# Altium PCB 混频器.PcbDoc
Units mil, origin at the board's own origin, x right, y up, seen from the top; angles counter-clockwise.
Board outline 3896 x 3698 mil, 2 copper layers (Top Layer, Bottom Layer); 45 components, 5 nets, 153 pads, 522 vias.
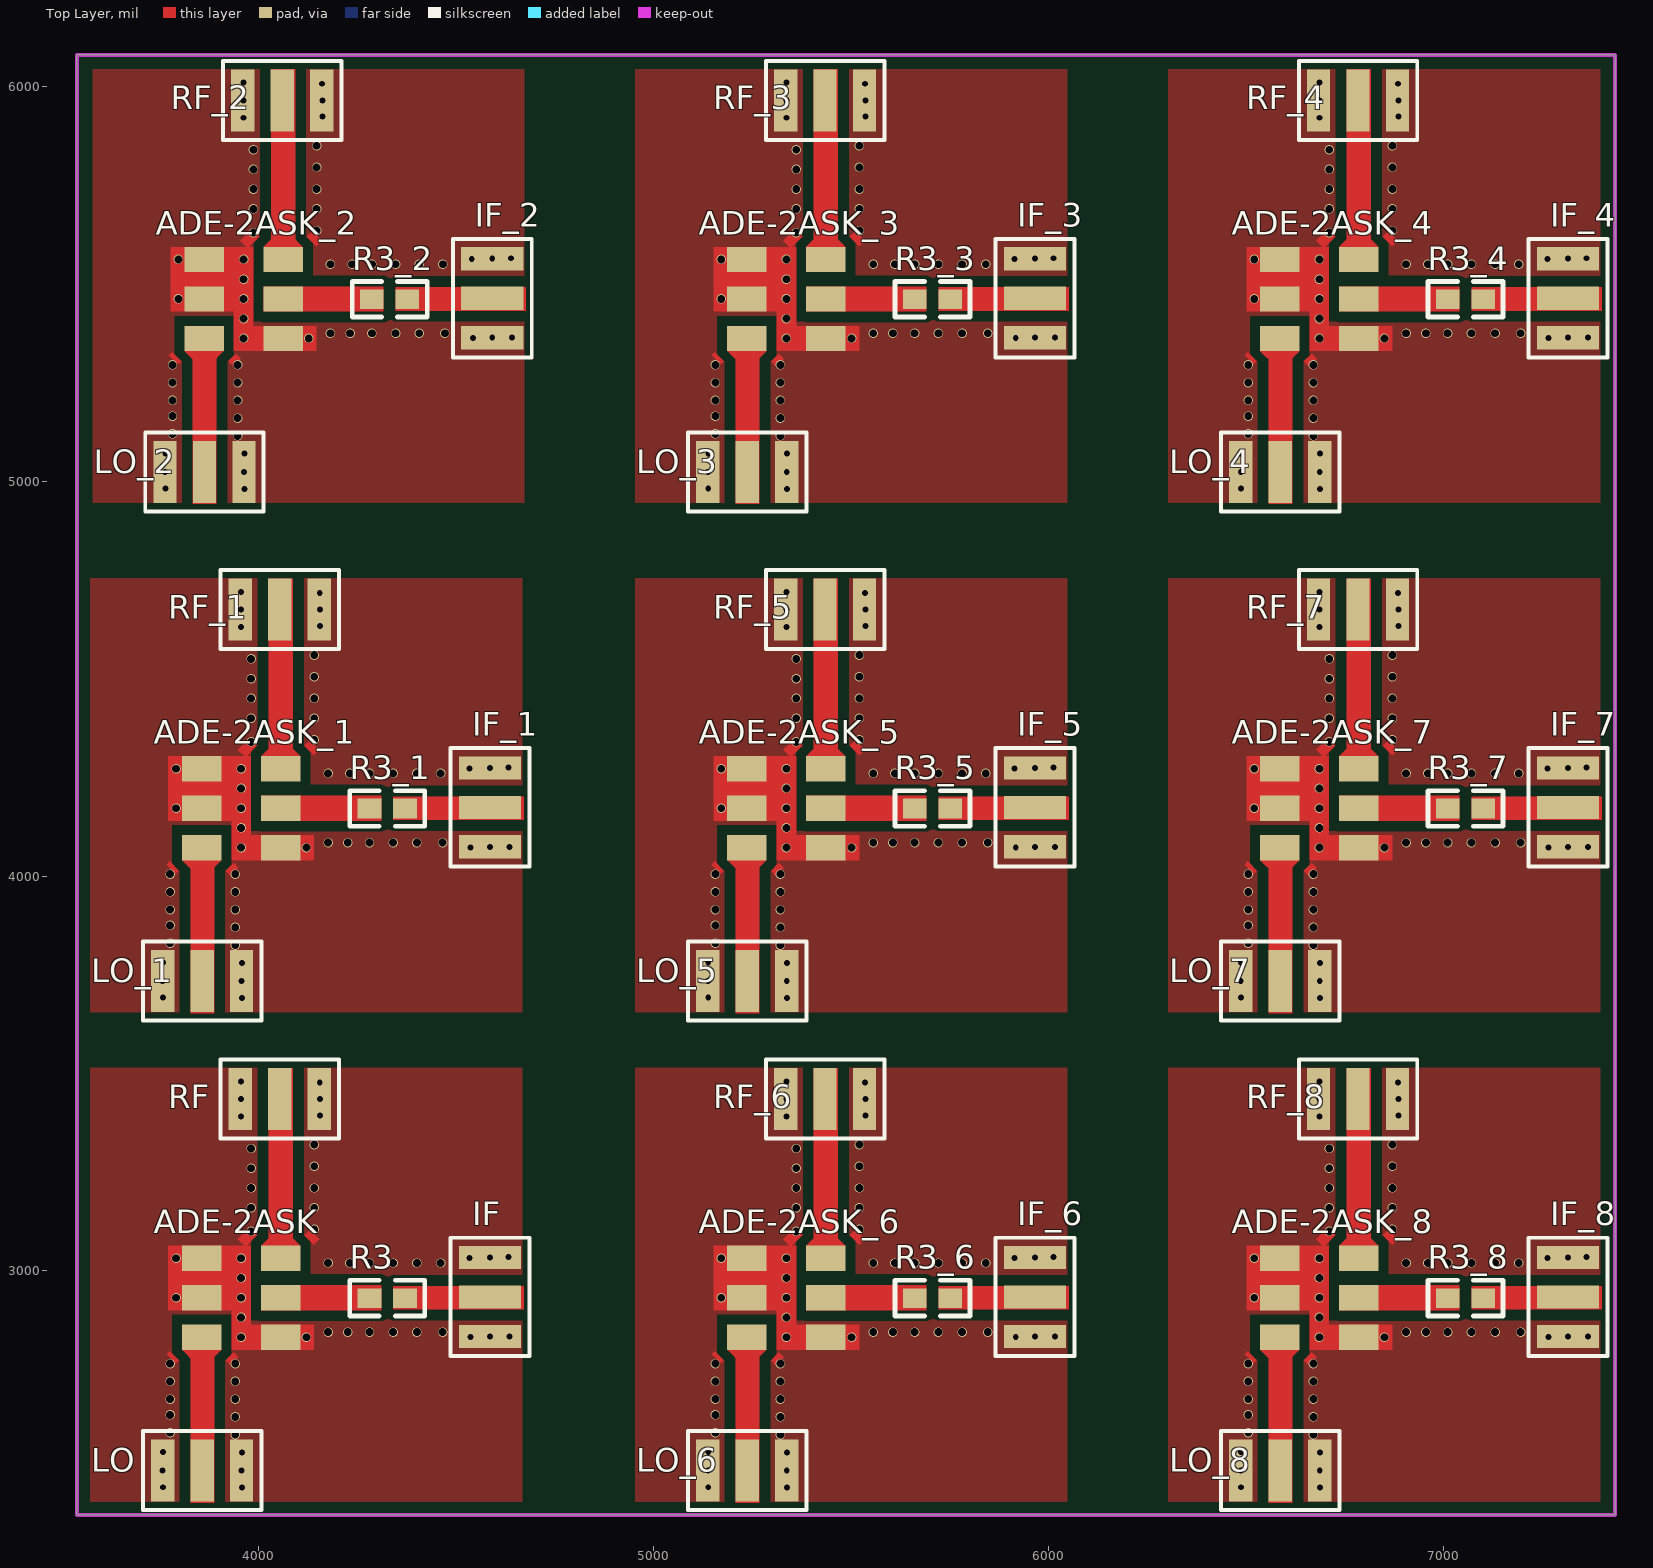
[diagram p0: Top Layer view]
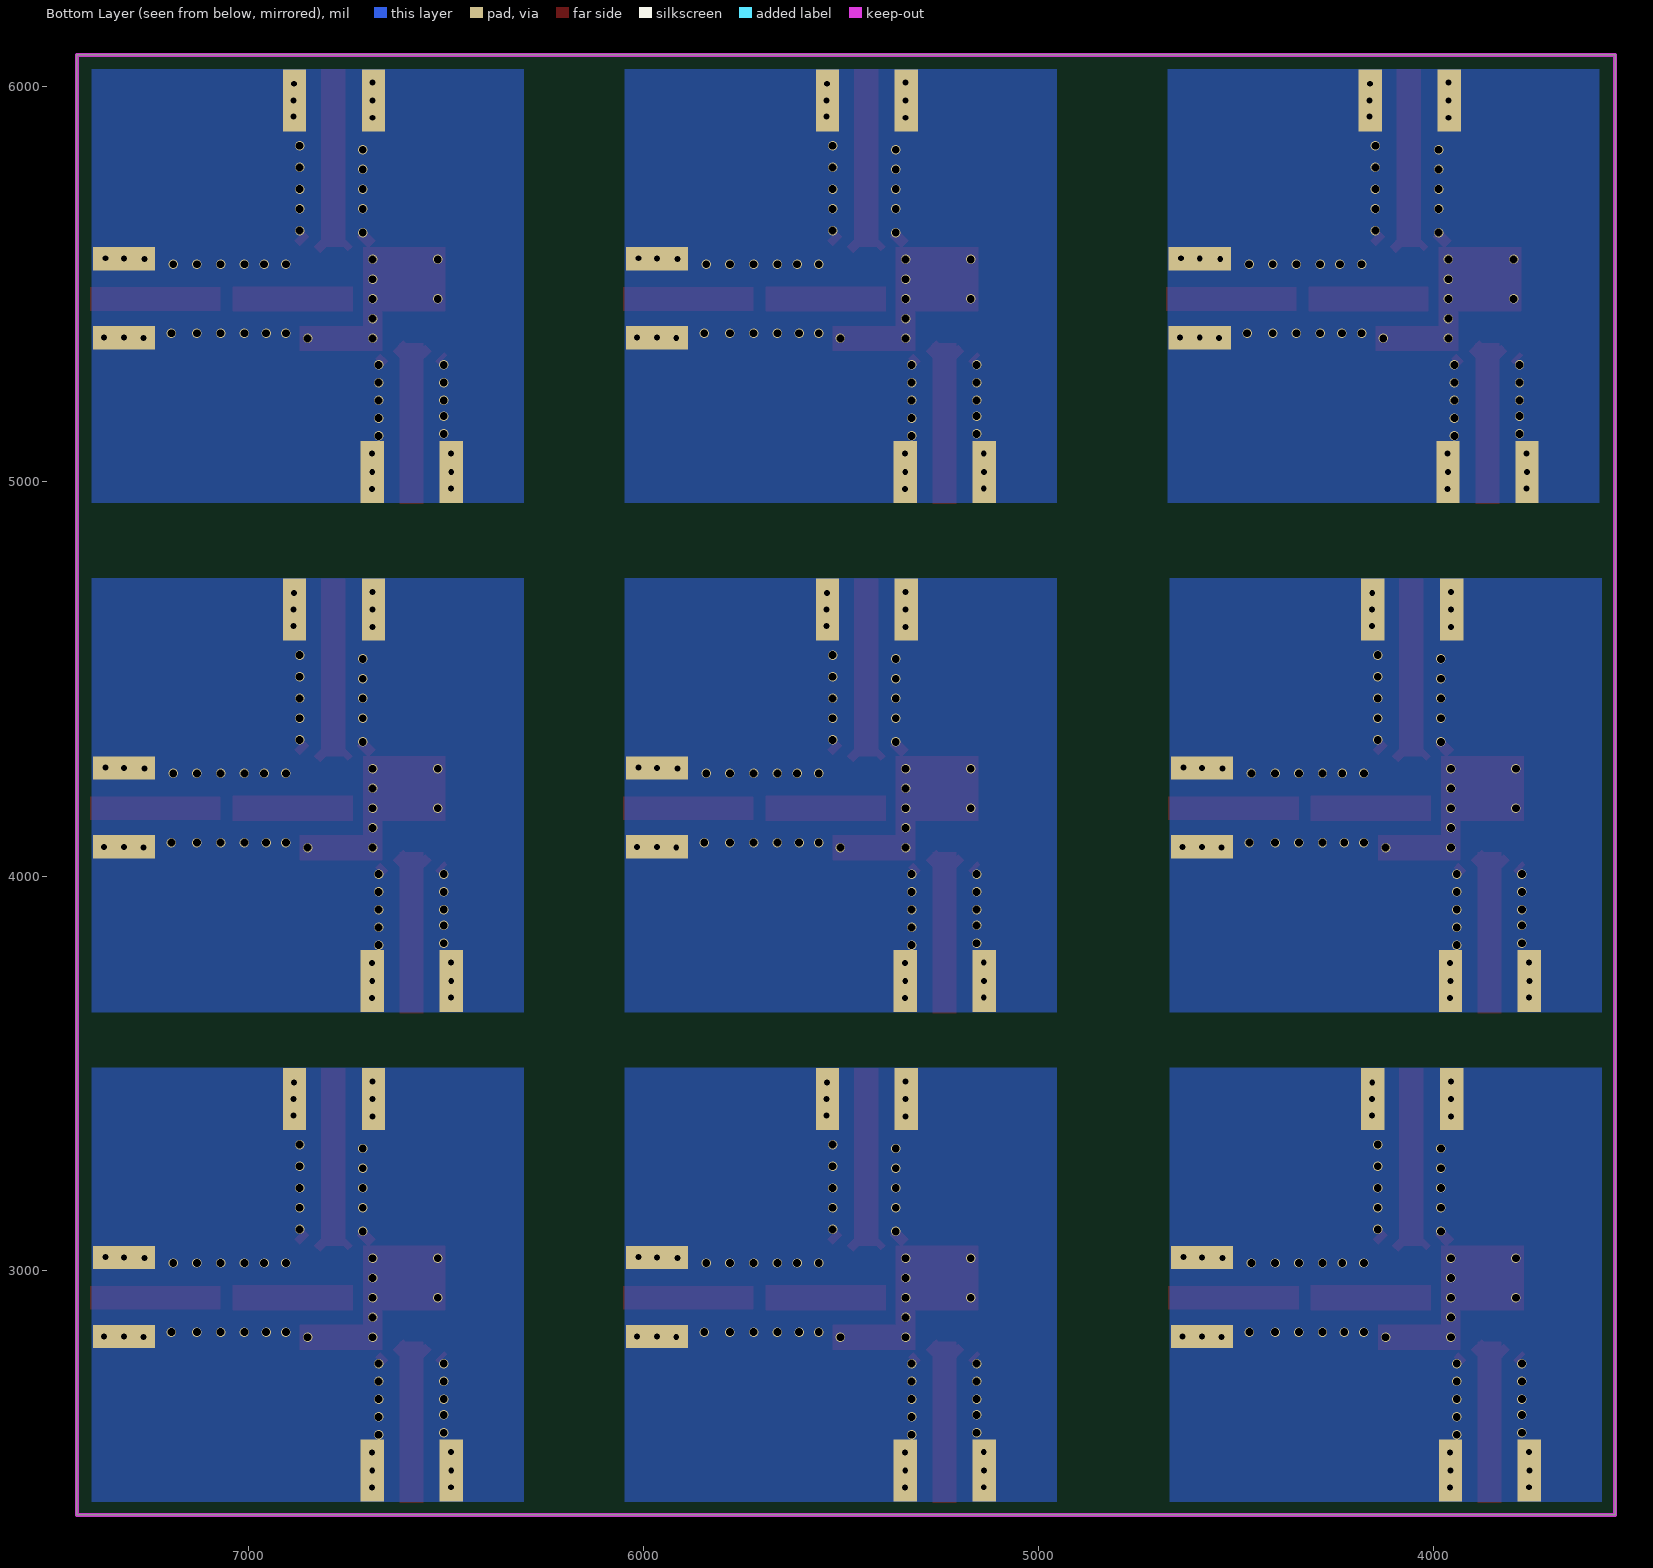
[diagram p1: Bottom Layer view, seen from below]
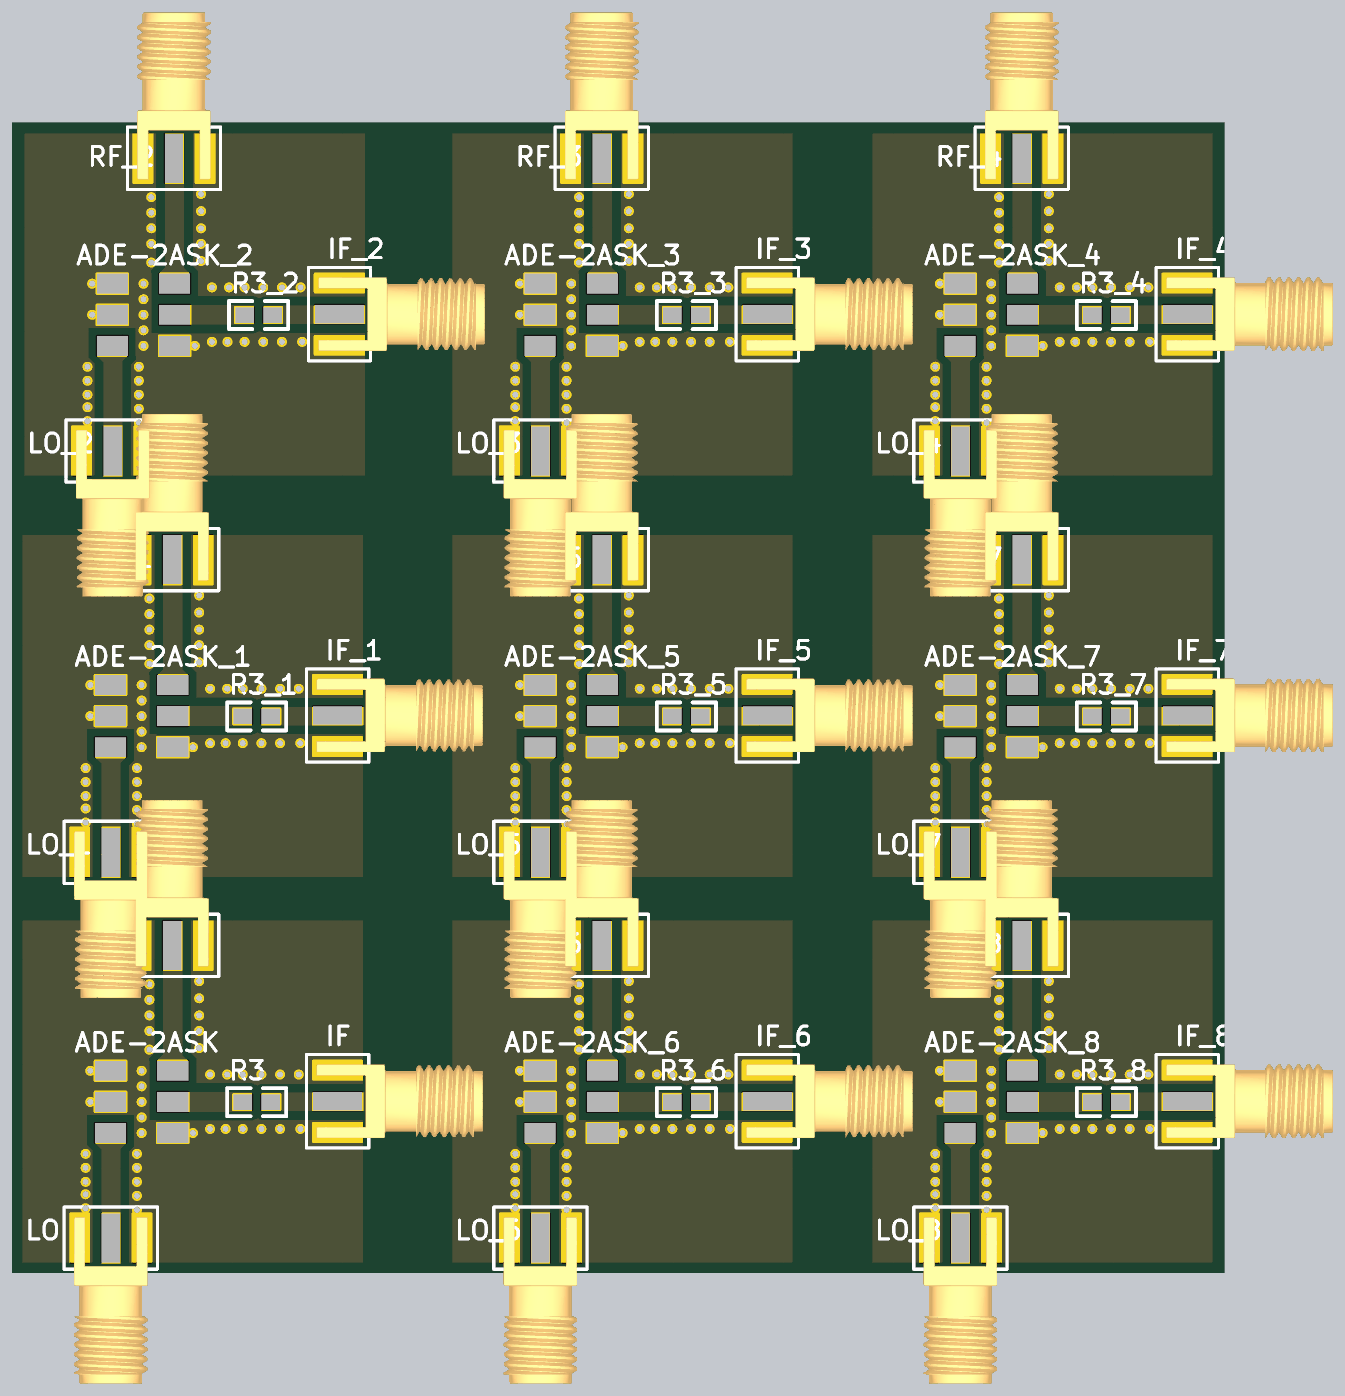
[diagram p2: 3D render of the assembled board from above, using the file's embedded part models]

## Layer stack, top to bottom
Top Solder: solder mask 0.4, Solder Resist, Dk 3.5
Top Layer: signal copper 1.4
Dielectric 1: dielectric 12.6, FR-4, Dk 4.8
Bottom Layer: signal copper 1.4
Bottom Solder: solder mask 0.4, Solder Resist, Dk 3.5

## Board outline
3539,2382 3539,6080 7435,6080 7435,2382

## Design rules (kind name [scope] priority, off if disabled: settings)
Clearance [All] p1: gap=10
PolygonConnect [All] p1: connectstyle=Direct reliefconductorwidth=10 reliefentries=4 polygonreliefangle="90 Angle" airgapwidth=10
RoutingVias [All] p1: holewidth=28 width=50 viastyle="Through Hole" minholewidth=28 minwidth=50 maxholewidth=28 maxwidth=50
SolderMaskExpansion [All] p1: expansion=4
Width [All] p1: maxlimit=60 minlimit=6 preferedwidth=10
30 further rules are at their usual default settings.

## Classes and differential pairs
component class 混频器: ADE-2ASK IF LO R3 RF

## Components (designator, comment, footprint, x,y, rotation, side; value= is the part's Value field where it differs from the comment)
ADE-2ASK "4 HEADER" PL-052 4105,2800 r90 top
ADE-2ASK_1 "4 HEADER" PL-052 4105,4040 r90 top (schematic designator ADE-2ASK)
ADE-2ASK_2 "4 HEADER" PL-052 4111,5330 r90 top (schematic designator ADE-2ASK)
ADE-2ASK_3 "4 HEADER" PL-052 5486,5330 r90 top (schematic designator ADE-2ASK)
ADE-2ASK_4 "4 HEADER" PL-052 6836,5330 r90 top (schematic designator ADE-2ASK)
ADE-2ASK_5 "4 HEADER" PL-052 5486,4040 r90 top (schematic designator ADE-2ASK)
ADE-2ASK_6 "4 HEADER" PL-052 5486,2800 r90 top (schematic designator ADE-2ASK)
ADE-2ASK_7 "4 HEADER" PL-052 6836,4040 r90 top (schematic designator ADE-2ASK)
ADE-2ASK_8 "4 HEADER" PL-052 6836,2800 r90 top (schematic designator ADE-2ASK)
IF "SMA-2" SMA-2 4585,2934 r90 top
IF_1 "SMA-2" SMA-2 4585,4174 r90 top (schematic designator IF)
IF_2 "SMA-2" SMA-2 4591,5464 r90 top (schematic designator IF)
IF_3 "SMA-2" SMA-2 5966,5464 r90 top (schematic designator IF)
IF_4 "SMA-2" SMA-2 7316,5464 r90 top (schematic designator IF)
IF_5 "SMA-2" SMA-2 5966,4174 r90 top (schematic designator IF)
IF_6 "SMA-2" SMA-2 5966,2934 r90 top (schematic designator IF)
IF_7 "SMA-2" SMA-2 7316,4174 r90 top (schematic designator IF)
IF_8 "SMA-2" SMA-2 7316,2934 r90 top (schematic designator IF)
LO "SMA-2" SMA-2 3856,2494 r0 top
LO_1 "SMA-2" SMA-2 3856,3734 r0 top (schematic designator LO)
LO_2 "SMA-2" SMA-2 3862,5024 r0 top (schematic designator LO)
LO_3 "SMA-2" SMA-2 5237,5024 r0 top (schematic designator LO)
LO_4 "SMA-2" SMA-2 6587,5024 r0 top (schematic designator LO)
LO_5 "SMA-2" SMA-2 5237,3734 r0 top (schematic designator LO)
LO_6 "SMA-2" SMA-2 5237,2494 r0 top (schematic designator LO)
LO_7 "SMA-2" SMA-2 6587,3734 r0 top (schematic designator LO)
LO_8 "SMA-2" SMA-2 6587,2494 r0 top (schematic designator LO)
R3 "RES" 0805 4370,2931 r180 top
R3_1 "RES" 0805 4370,4171 r180 top (schematic designator R3)
R3_2 "RES" 0805 4376,5461 r180 top (schematic designator R3)
R3_3 "RES" 0805 5751,5461 r180 top (schematic designator R3)
R3_4 "RES" 0805 7101,5461 r180 top (schematic designator R3)
R3_5 "RES" 0805 5751,4171 r180 top (schematic designator R3)
R3_6 "RES" 0805 5751,2931 r180 top (schematic designator R3)
R3_7 "RES" 0805 7101,4171 r180 top (schematic designator R3)
R3_8 "RES" 0805 7101,2931 r180 top (schematic designator R3)
RF "SMA-2" SMA-2 4053,3435 r180 top
RF_1 "SMA-2" SMA-2 4053,4675 r180 top (schematic designator RF)
RF_2 "SMA-2" SMA-2 4059,5965 r180 top (schematic designator RF)
RF_3 "SMA-2" SMA-2 5434,5965 r180 top (schematic designator RF)
RF_4 "SMA-2" SMA-2 6784,5965 r180 top (schematic designator RF)
RF_5 "SMA-2" SMA-2 5434,4675 r180 top (schematic designator RF)
RF_6 "SMA-2" SMA-2 5434,3435 r180 top (schematic designator RF)
RF_7 "SMA-2" SMA-2 6784,4675 r180 top (schematic designator RF)
RF_8 "SMA-2" SMA-2 6784,3435 r180 top (schematic designator RF)

## Footprints (in the part's own frame and the unit in brackets; to place one, negate y for a bottom-side part, rotate by r counter-clockwise, add the part's x,y. Pads: shape width x height; smd on the part's side, far side on the other; paste and mask are expansions set on the pad)
0805 [mil]
  rect 60x50 smd: 1(0,0) 2(90,0)
  silkscreen extent -50,-45 140,45
PL-052 [mil]
  rect 64x100 smd: 1(32,50) 1(132,250) 1(232,250) 2(132,50) 3(232,50) 4(32,250)
  Top Layer region: 0,-35 64,-35 64,175 0,175
  Top Layer region: 0,125 264,125 264,175 0,175
  Top Layer region: 100,170 264,170 264,335 100,335
SMA-2 [mm]
  rect 1.5x4 smd: 1(0,0)
  rect 1.5x4 all layers, no hole: 2(2.54,0) 3(-2.54,0)
  silkscreen extent -3.81,-2.54 3.81,2.54, body extent -3,-11.89 3,1.71, height 3.2

## Part data
ADE-2ASK ADE-2ASK_1 ADE-2ASK_2 ADE-2ASK_3 ADE-2ASK_4 ADE-2ASK_5 ADE-2ASK_6 ADE-2ASK_7 ADE-2ASK_8: "4 Pin Header"

## Via types
v1: diameter 24, hole 20, Top Layer to Bottom Layer, 360 vias
v2: diameter 30, hole 15, Top Layer to Bottom Layer, 162 vias

## Nets (pads, with @x,y where several pads share a name; then routed paths per layer and width w, separated by ;. In a path a pad name is that pad's centre, name@x,y a point inside that pad or via, vN(x,y) a via of type N, cw(c..) or ccw(c..) an arc to the next point about the centre after c; other vN are vias at no path point)
GND: ADE-2ASK.1 IF.2 IF.3 LO.2 LO.3 RF.2 RF.3
  other v1: 3940,2585 3775,2590 3940,2630 3775,2635 3775,2675 3940,2675 3775,2720 3940,2720 3775,2765 3940,2765 3955,2832 4120,2832 4175,2845 4225,2845 4280,2845 4340,2845 4400,2845 4465,2845 3955,2882 3790,2932 3955,2932 3955,2982 4175,3020 4230,3020 4280,3020 4340,3020 4400,3020 4460,3020 3790,3032 3955,3032 3980,3100 4140,3105 3980,3160 4140,3160 3980,3210 4140,3210 3980,3260 4140,3265 3980,3310 4140,3320
  other v2: 3957,2451 3757,2452 3756,2494 3956,2494 3957,2540 3757,2541 4536,2833 4585,2834 4635,2834 4533,3033 4585,3034 4632,3035 3955,3391 4155,3394 3955,3435 4155,3435 4154,3477 3955,3480
NetADE-2ASK_2: ADE-2ASK.2 R3.2
NetADE-2ASK_3: ADE-2ASK.3 RF.1
NetADE-2ASK_4: ADE-2ASK.4 LO.1
NetIF_1: IF.1 R3.1
pads on no net: ADE-2ASK_1.1 ADE-2ASK_1.2 ADE-2ASK_1.3 ADE-2ASK_1.4 ADE-2ASK_2.1 ADE-2ASK_2.2 ADE-2ASK_2.3 ADE-2ASK_2.4 ADE-2ASK_3.1 ADE-2ASK_3.2 ADE-2ASK_3.3 ADE-2ASK_3.4 ADE-2ASK_4.1 ADE-2ASK_4.2 ADE-2ASK_4.3 ADE-2ASK_4.4 ADE-2ASK_5.1 ADE-2ASK_5.2 ADE-2ASK_5.3 ADE-2ASK_5.4 ADE-2ASK_6.1 ADE-2ASK_6.2 ADE-2ASK_6.3 ADE-2ASK_6.4 ADE-2ASK_7.1 ADE-2ASK_7.2 ADE-2ASK_7.3 ADE-2ASK_7.4 ADE-2ASK_8.1 ADE-2ASK_8.2 ADE-2ASK_8.3 ADE-2ASK_8.4 IF_1.1 IF_1.2 IF_1.3 IF_2.1 IF_2.2 IF_2.3 IF_3.1 IF_3.2 IF_3.3 IF_4.1 IF_4.2 IF_4.3 IF_5.1 IF_5.2 IF_5.3 IF_6.1 IF_6.2 IF_6.3 IF_7.1 IF_7.2 IF_7.3 IF_8.1 IF_8.2 IF_8.3 LO_1.1 LO_1.2 LO_1.3 LO_2.1 LO_2.2 LO_2.3 LO_3.1 LO_3.2 LO_3.3 LO_4.1 LO_4.2 LO_4.3 LO_5.1 LO_5.2 LO_5.3 LO_6.1 LO_6.2 LO_6.3 LO_7.1 LO_7.2 LO_7.3 LO_8.1 LO_8.2 LO_8.3 R3_1.1 R3_1.2 R3_2.1 R3_2.2 R3_3.1 R3_3.2 R3_4.1 R3_4.2 R3_5.1 R3_5.2 R3_6.1 R3_6.2 R3_7.1 R3_7.2 R3_8.1 R3_8.2 RF_1.1 RF_1.2 RF_1.3 RF_2.1 RF_2.2 RF_2.3 RF_3.1 RF_3.2 RF_3.3 RF_4.1 RF_4.2 RF_4.3 RF_5.1 RF_5.2 RF_5.3 RF_6.1 RF_6.2 RF_6.3 RF_7.1 RF_7.2 RF_7.3 RF_8.1 RF_8.2 RF_8.3
copper on no net:
  other v1: 5321,2585 6671,2585 5156,2590 6506,2590 5321,2630 6671,2630 5156,2635 6506,2635 5156,2675 5321,2675 6506,2675 6671,2675 5156,2720 5321,2720 6506,2720 6671,2720 5156,2765 5321,2765 6506,2765 6671,2765 5336,2832 5501,2832 6686,2832 6851,2832 5556,2845 5606,2845 5661,2845 5721,2845 5781,2845 5846,2845 6906,2845 6956,2845 7011,2845 7071,2845 7131,2845 7196,2845 5336,2882 6686,2882 5171,2932 5336,2932 6521,2932 6686,2932 5336,2982 6686,2982 5556,3020 5611,3020 5661,3020 5721,3020 5781,3020 5841,3020 6906,3020 6961,3020 7011,3020 7071,3020 7131,3020 7191,3020 5171,3032 5336,3032 6521,3032 6686,3032 5361,3100 6711,3100 5521,3105 6871,3105 5361,3160 5521,3160 6711,3160 6871,3160 5361,3210 5521,3210 6711,3210 6871,3210 5361,3260 6711,3260 5521,3265 6871,3265 5361,3310 6711,3310 5521,3320 6871,3320 3940,3825 5321,3825 6671,3825 3775,3830 5156,3830 6506,3830 3940,3870 5321,3870 6671,3870 3775,3875 5156,3875 6506,3875 3775,3915 3940,3915 5156,3915 5321,3915 6506,3915 6671,3915 3775,3960 3940,3960 5156,3960 5321,3960 6506,3960 6671,3960 3775,4005 3940,4005 5156,4005 5321,4005 6506,4005 6671,4005 3955,4072 4120,4072 5336,4072 5501,4072 6686,4072 6851,4072 4175,4085 4225,4085 4280,4085 4340,4085 4400,4085 4465,4085 5556,4085 5606,4085 5661,4085 5721,4085 5781,4085 5846,4085 6906,4085 6956,4085 7011,4085 7071,4085 7131,4085 7196,4085 3955,4122 5336,4122 6686,4122 3790,4172 3955,4172 5171,4172 5336,4172 6521,4172 6686,4172 3955,4222 5336,4222 6686,4222 4175,4260 4230,4260 4280,4260 4340,4260 4400,4260 4460,4260 5556,4260 5611,4260 5661,4260 5721,4260 5781,4260 5841,4260 6906,4260 6961,4260 7011,4260 7071,4260 7131,4260 7191,4260 3790,4272 3955,4272 5171,4272 5336,4272 6521,4272 6686,4272 3980,4340 5361,4340 6711,4340 4140,4345 5521,4345 6871,4345 3980,4400 4140,4400 5361,4400 5521,4400 6711,4400 6871,4400 3980,4450 4140,4450 5361,4450 5521,4450 6711,4450 6871,4450 3980,4500 5361,4500 6711,4500 4140,4505 5521,4505 6871,4505 3980,4550 5361,4550 6711,4550 4140,4560 5521,4560 6871,4560 3946,5115 5321,5115 6671,5115 3781,5120 5156,5120 6506,5120 3946,5160 5321,5160 6671,5160 3781,5165 5156,5165 6506,5165 3781,5205 3946,5205 5156,5205 5321,5205 6506,5205 6671,5205 3781,5250 3946,5250 5156,5250 5321,5250 6506,5250 6671,5250 3781,5295 3946,5295 5156,5295 5321,5295 6506,5295 6671,5295 3961,5362 4126,5362 5336,5362 5501,5362 6686,5362 6851,5362 4181,5375 4231,5375 4286,5375 4346,5375 4406,5375 4471,5375 5556,5375 5606,5375 5661,5375 5721,5375 5781,5375 5846,5375 6906,5375 6956,5375 7011,5375 7071,5375 7131,5375 7196,5375 3961,5412 5336,5412 6686,5412 3796,5462 3961,5462 5171,5462 5336,5462 6521,5462 6686,5462 3961,5512 5336,5512 6686,5512 4181,5550 4236,5550 4286,5550 4346,5550 4406,5550 4466,5550 5556,5550 5611,5550 5661,5550 5721,5550 5781,5550 5841,5550 6906,5550 6961,5550 7011,5550 7071,5550 7131,5550 7191,5550 3796,5562 3961,5562 5171,5562 5336,5562 6521,5562 6686,5562 3986,5630 5361,5630 6711,5630 4146,5635 5521,5635 6871,5635 3986,5690 4146,5690 5361,5690 5521,5690 6711,5690 6871,5690 3986,5740 4146,5740 5361,5740 5521,5740 6711,5740 6871,5740 3986,5790 5361,5790 6711,5790 4146,5795 5521,5795 6871,5795 3986,5840 5361,5840 6711,5840 4146,5850 5521,5850 6871,5850
  other v2: 5338,2451 6688,2451 5138,2452 6488,2452 5137,2494 5337,2494 6487,2494 6687,2494 5338,2540 6688,2540 5138,2541 6488,2541 5917,2833 7267,2833 5966,2834 6016,2834 7316,2834 7366,2834 5914,3033 7264,3033 5966,3034 7316,3034 6013,3035 7363,3035 5336,3391 6686,3391 5536,3394 6886,3394 5336,3435 5536,3435 6686,3435 6886,3435 5535,3477 6885,3477 5336,3480 6686,3480 3957,3691 5338,3691 6688,3691 3757,3692 5138,3692 6488,3692 3756,3734 3956,3734 5137,3734 5337,3734 6487,3734 6687,3734 3957,3780 5338,3780 6688,3780 3757,3781 5138,3781 6488,3781 4536,4073 5917,4073 7267,4073 4585,4074 4635,4074 5966,4074 6016,4074 7316,4074 7366,4074 4533,4273 5914,4273 7264,4273 4585,4274 5966,4274 7316,4274 4632,4275 6013,4275 7363,4275 3955,4631 5336,4631 6686,4631 4155,4634 5536,4634 6886,4634 3955,4675 4155,4675 5336,4675 5536,4675 6686,4675 6886,4675 4154,4717 5535,4717 6885,4717 3955,4720 5336,4720 6686,4720 3963,4981 5338,4981 6688,4981 3763,4982 5138,4982 6488,4982 3762,5024 3962,5024 5137,5024 5337,5024 6487,5024 6687,5024 3963,5070 5338,5070 6688,5070 3763,5071 5138,5071 6488,5071 4542,5363 5917,5363 7267,5363 4591,5364 4641,5364 5966,5364 6016,5364 7316,5364 7366,5364 4539,5563 5914,5563 7264,5563 4591,5564 5966,5564 7316,5564 4638,5565 6013,5565 7363,5565 3961,5921 5336,5921 6686,5921 4161,5924 5536,5924 6886,5924 3961,5965 4161,5965 5336,5965 5536,5965 6686,5965 6886,5965 4160,6007 5535,6007 6885,6007 3961,6010 5336,6010 6686,6010

## Polygon pours and split planes (outlines as drawn)
no net on Top Layer "Top Layer-No Net" (solid, pour order 47): 6270,3548 7431,3548 7431,2382 6270,2382
no net on Top Layer "Top Layer-No Net" (solid, pour order 43): 6270,4788 7431,4788 7431,3622 6270,3622
no net on Top Layer "Top Layer-No Net" (solid, pour order 39): 4920,3548 6081,3548 6081,2382 4920,2382
no net on Top Layer "Top Layer-No Net" (solid, pour order 35): 4920,4788 6081,4788 6081,3622 4920,3622
no net on Top Layer "Top Layer-No Net" (solid, pour order 31): 6270,6078 7431,6078 7431,4912 6270,4912
no net on Top Layer "Top Layer-No Net" (solid, pour order 27): 4920,6078 6081,6078 6081,4912 4920,4912
no net on Top Layer "Top Layer-No Net" (solid, pour order 23): 3545,6078 4706,6078 4706,4912 3545,4912
no net on Top Layer "Top Layer-No Net" (solid, pour order 19): 3539,4788 4700,4788 4700,3622 3539,3622
GND on Top Layer "Top Layer-No Net" (solid, pour order 11): 3539,3548 4700,3548 4700,2382 3539,2382
no net on Bottom Layer "Top Layer-No Net" (solid, pour order 49): 6270,3548 7431,3548 7431,2382 6270,2382
no net on Bottom Layer "Top Layer-No Net" (solid, pour order 45): 6270,4788 7431,4788 7431,3622 6270,3622
no net on Bottom Layer "Top Layer-No Net" (solid, pour order 41): 4920,3548 6081,3548 6081,2382 4920,2382
no net on Bottom Layer "Top Layer-No Net" (solid, pour order 37): 4920,4788 6081,4788 6081,3622 4920,3622
no net on Bottom Layer "Top Layer-No Net" (solid, pour order 33): 6270,6078 7431,6078 7431,4912 6270,4912
no net on Bottom Layer "Top Layer-No Net" (solid, pour order 29): 4920,6078 6081,6078 6081,4912 4920,4912
no net on Bottom Layer "Top Layer-No Net" (solid, pour order 25): 3545,6078 4706,6078 4706,4912 3545,4912
no net on Bottom Layer "Top Layer-No Net" (solid, pour order 21): 3539,4788 4700,4788 4700,3622 3539,3622
GND on Bottom Layer "Top Layer-No Net" (solid, pour order 13): 3539,3548 4700,3548 4700,2382 3539,2382

## Keep-outs
Keep-Out Layer:
  the board outline again, w10

## Other copper
Top Layer:
  rectangle: 7071,2902 7402,2962
  rectangle: 6736,2900 7041,2964
  rectangle: 6755,3063 6817,3514
  rectangle: 6557,2412 6618,2821
  region: 6748.5,3051.5 6776,3079 6763.5,3091.5 6736,3064
  region: 6819,3047 6836,3064 6805,3095 6788,3078
  region: 6696.93,3060.07 6726.86,3090 6706.93,3109.93 6677,3080
  region: 6870.07,3065.07 6885,3080 6860.07,3104.93 6845.14,3090
  region: 6571.5,2764.5 6588,2781 6552.5,2816.5 6536,2800
  region: 6601,2765 6636,2800 6608,2828 6573,2793
  region: 6519.93,2765.07 6528.86,2774 6504.93,2797.93 6496,2789
  region: 6659.57,2760.57 6680,2781 6666.57,2794.43 6646.14,2774
  rectangle: 7071,4142 7402,4202
  rectangle: 6736,4140 7041,4204
  rectangle: 6755,4303 6817,4754
  rectangle: 6557,3652 6618,4061
  region: 6748.5,4291.5 6776,4319 6763.5,4331.5 6736,4304
  region: 6819,4287 6836,4304 6805,4335 6788,4318
  region: 6696.93,4300.07 6726.86,4330 6706.93,4349.93 6677,4320
  region: 6870.07,4305.07 6885,4320 6860.07,4344.93 6845.14,4330
  region: 6571.5,4004.5 6588,4021 6552.5,4056.5 6536,4040
  region: 6601,4005 6636,4040 6608,4068 6573,4033
  region: 6519.93,4005.07 6528.86,4014 6504.93,4037.93 6496,4029
  region: 6659.57,4000.57 6680,4021 6666.57,4034.43 6646.14,4014
  rectangle: 5721,2902 6052,2962
  rectangle: 5386,2900 5691,2964
  rectangle: 5405,3063 5467,3514
  rectangle: 5207,2412 5268,2821
  region: 5398.5,3051.5 5426,3079 5413.5,3091.5 5386,3064
  region: 5469,3047 5486,3064 5455,3095 5438,3078
  region: 5346.93,3060.07 5376.86,3090 5356.93,3109.93 5327,3080
  region: 5520.07,3065.07 5535,3080 5510.07,3104.93 5495.14,3090
  region: 5221.5,2764.5 5238,2781 5202.5,2816.5 5186,2800
  region: 5251,2765 5286,2800 5258,2828 5223,2793
  region: 5169.93,2765.07 5178.86,2774 5154.93,2797.93 5146,2789
  region: 5309.57,2760.57 5330,2781 5316.57,2794.43 5296.14,2774
  rectangle: 5721,4142 6052,4202
  rectangle: 5386,4140 5691,4204
  rectangle: 5405,4303 5467,4754
  rectangle: 5207,3652 5268,4061
  region: 5398.5,4291.5 5426,4319 5413.5,4331.5 5386,4304
  region: 5469,4287 5486,4304 5455,4335 5438,4318
  region: 5346.93,4300.07 5376.86,4330 5356.93,4349.93 5327,4320
  region: 5520.07,4305.07 5535,4320 5510.07,4344.93 5495.14,4330
  region: 5221.5,4004.5 5238,4021 5202.5,4056.5 5186,4040
  region: 5251,4005 5286,4040 5258,4068 5223,4033
  region: 5169.93,4005.07 5178.86,4014 5154.93,4037.93 5146,4029
  region: 5309.57,4000.57 5330,4021 5316.57,4034.43 5296.14,4014
  rectangle: 7071,5432 7402,5492
  rectangle: 6736,5430 7041,5494
  rectangle: 6755,5593 6817,6044
  rectangle: 6557,4942 6618,5351
  region: 6748.5,5581.5 6776,5609 6763.5,5621.5 6736,5594
  region: 6819,5577 6836,5594 6805,5625 6788,5608
  region: 6696.93,5590.07 6726.86,5620 6706.93,5639.93 6677,5610
  region: 6870.07,5595.07 6885,5610 6860.07,5634.93 6845.14,5620
  region: 6571.5,5294.5 6588,5311 6552.5,5346.5 6536,5330
  region: 6601,5295 6636,5330 6608,5358 6573,5323
  region: 6519.93,5295.07 6528.86,5304 6504.93,5327.93 6496,5319
  region: 6659.57,5290.57 6680,5311 6666.57,5324.43 6646.14,5304
  rectangle: 5721,5432 6052,5492
  rectangle: 5386,5430 5691,5494
  rectangle: 5405,5593 5467,6044
  rectangle: 5207,4942 5268,5351
  region: 5398.5,5581.5 5426,5609 5413.5,5621.5 5386,5594
  region: 5469,5577 5486,5594 5455,5625 5438,5608
  region: 5346.93,5590.07 5376.86,5620 5356.93,5639.93 5327,5610
  region: 5520.07,5595.07 5535,5610 5510.07,5634.93 5495.14,5620
  region: 5221.5,5294.5 5238,5311 5202.5,5346.5 5186,5330
  region: 5251,5295 5286,5330 5258,5358 5223,5323
  region: 5169.93,5295.07 5178.86,5304 5154.93,5327.93 5146,5319
  region: 5309.57,5290.57 5330,5311 5316.57,5324.43 5296.14,5304
  rectangle: 4346,5432 4677,5492
  rectangle: 4011,5430 4316,5494
  rectangle: 4030,5593 4092,6044
  rectangle: 3832,4942 3893,5351
  region: 4023.5,5581.5 4051,5609 4038.5,5621.5 4011,5594
  region: 4094,5577 4111,5594 4080,5625 4063,5608
  region: 3971.93,5590.07 4001.86,5620 3981.93,5639.93 3952,5610
  region: 4145.07,5595.07 4160,5610 4135.07,5634.93 4120.14,5620
  region: 3846.5,5294.5 3863,5311 3827.5,5346.5 3811,5330
  region: 3876,5295 3911,5330 3883,5358 3848,5323
  region: 3794.93,5295.07 3803.86,5304 3779.93,5327.93 3771,5319
  region: 3934.57,5290.57 3955,5311 3941.57,5324.43 3921.14,5304
  rectangle: 4340,4142 4671,4202
  rectangle: 4005,4140 4310,4204
  rectangle: 4024,4303 4086,4754
  rectangle: 3826,3652 3887,4061
  region: 4017.5,4291.5 4045,4319 4032.5,4331.5 4005,4304
  region: 4088,4287 4105,4304 4074,4335 4057,4318
  region: 3965.93,4300.07 3995.86,4330 3975.93,4349.93 3946,4320
  region: 4139.07,4305.07 4154,4320 4129.07,4344.93 4114.14,4330
  region: 3840.5,4004.5 3857,4021 3821.5,4056.5 3805,4040
  region: 3870,4005 3905,4040 3877,4068 3842,4033
  region: 3788.93,4005.07 3797.86,4014 3773.93,4037.93 3765,4029
  region: 3928.57,4000.57 3949,4021 3935.57,4034.43 3915.14,4014
  region net GND: 3928.57,2760.57 3949,2781 3935.57,2794.43 3915.14,2774
  region net GND: 3788.93,2765.07 3797.86,2774 3773.93,2797.93 3765,2789
  region net NetADE-2ASK_4: 3870,2765 3905,2800 3877,2828 3842,2793
  region net NetADE-2ASK_4: 3840.5,2764.5 3857,2781 3821.5,2816.5 3805,2800
  region net GND: 4139.07,3065.07 4154,3080 4129.07,3104.93 4114.14,3090
  region net GND: 3965.93,3060.07 3995.86,3090 3975.93,3109.93 3946,3080
  region net NetADE-2ASK_3: 4088,3047 4105,3064 4074,3095 4057,3078
  region net NetADE-2ASK_3: 4017.5,3051.5 4045,3079 4032.5,3091.5 4005,3064
  rectangle net NetADE-2ASK_4: 3826,2412 3887,2821
  rectangle net NetADE-2ASK_3: 4024,3063 4086,3514
  rectangle net NetADE-2ASK_2: 4005,2900 4310,2964
  rectangle net NetIF_1: 4340,2902 4671,2962